# Altium PCB TD_A.pcbdoc
Units mil, origin at the board's own origin, x right, y up, seen from the top; angles counter-clockwise.
Board outline 3250 x 2850 mil, 2 copper layers (Top Layer, Bottom Layer); 39 components, 27 nets, 123 pads, 86 vias.
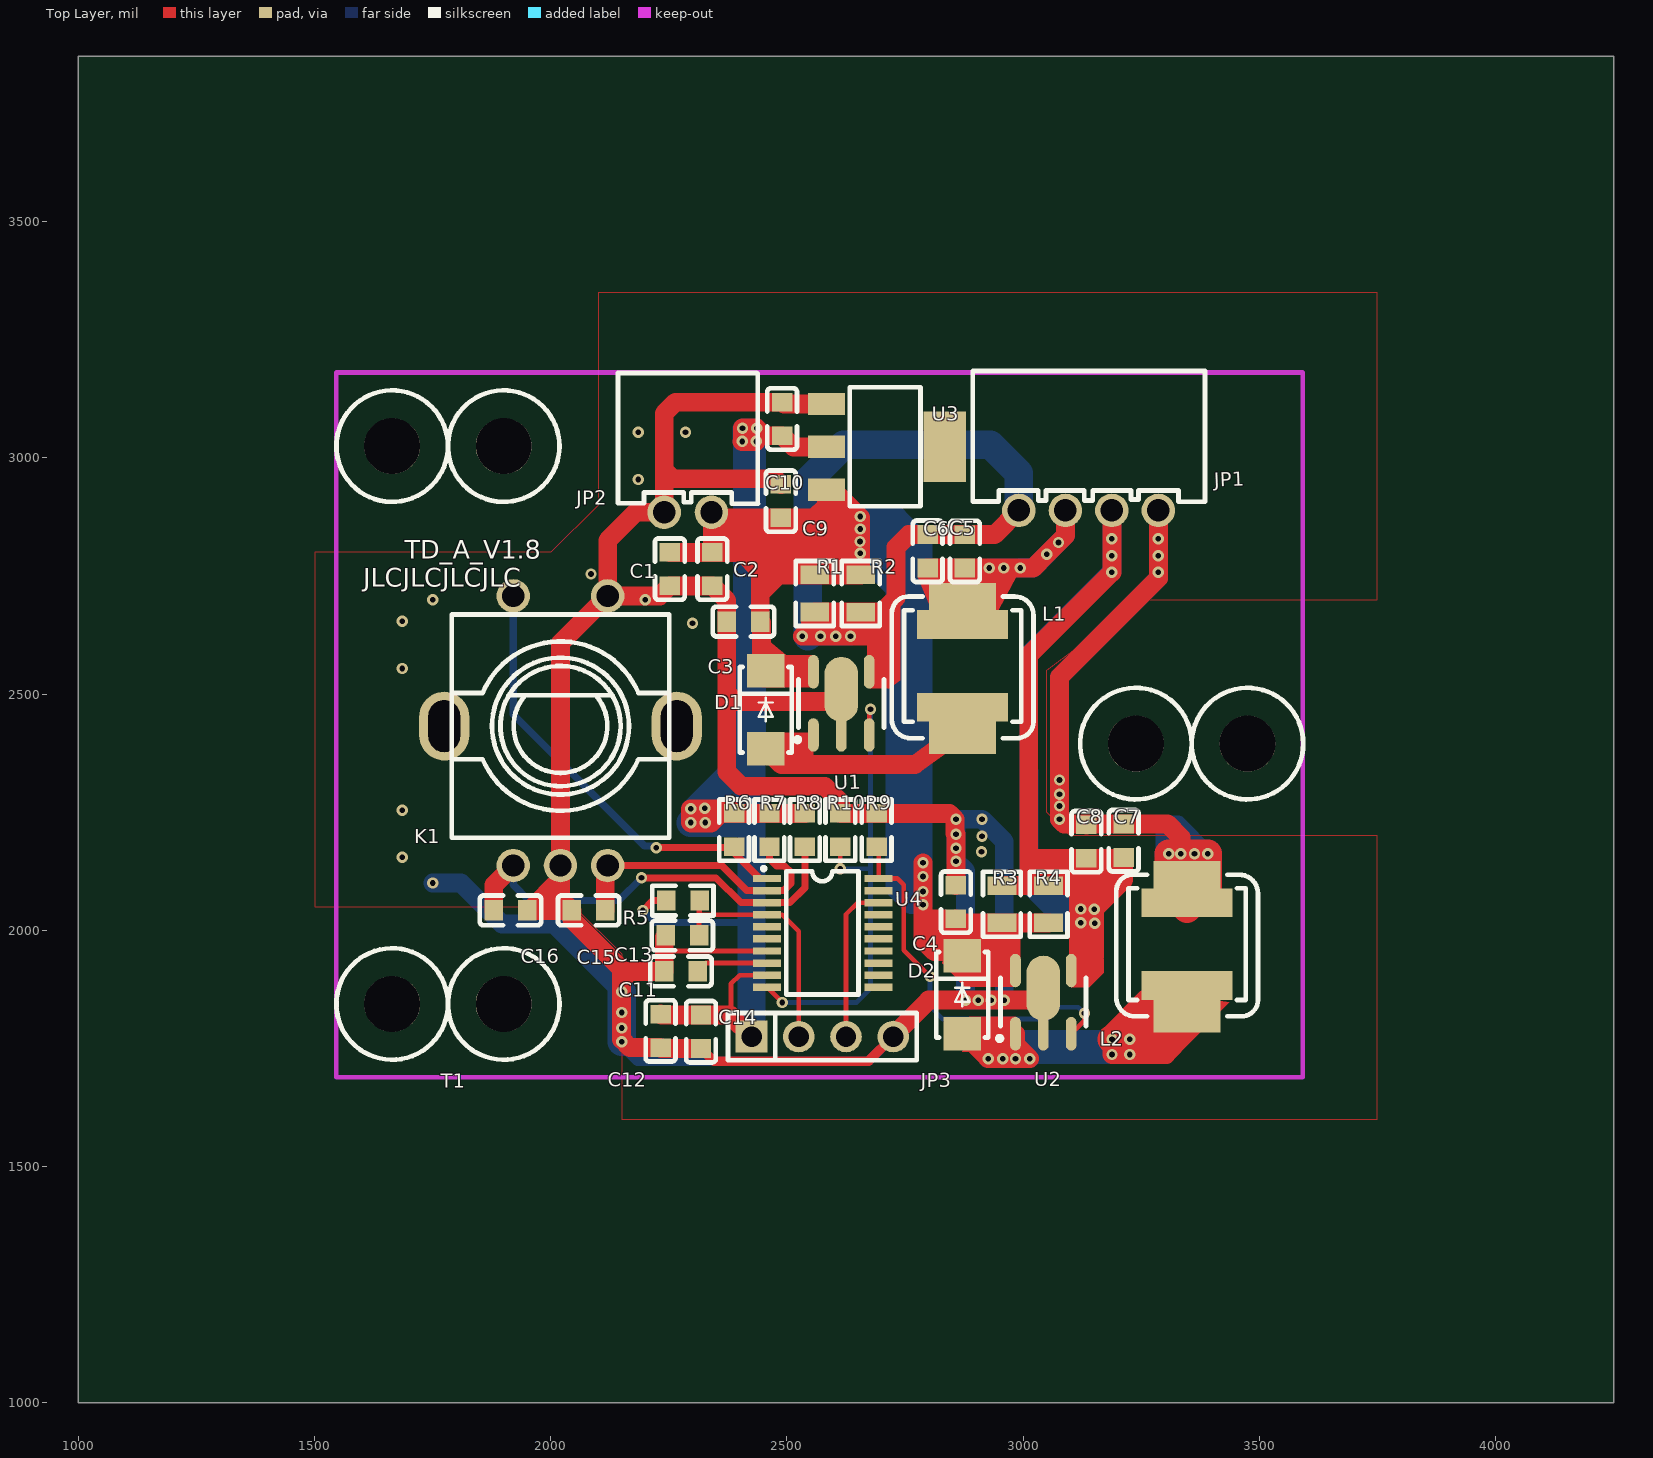
[diagram p0: Top Layer view]
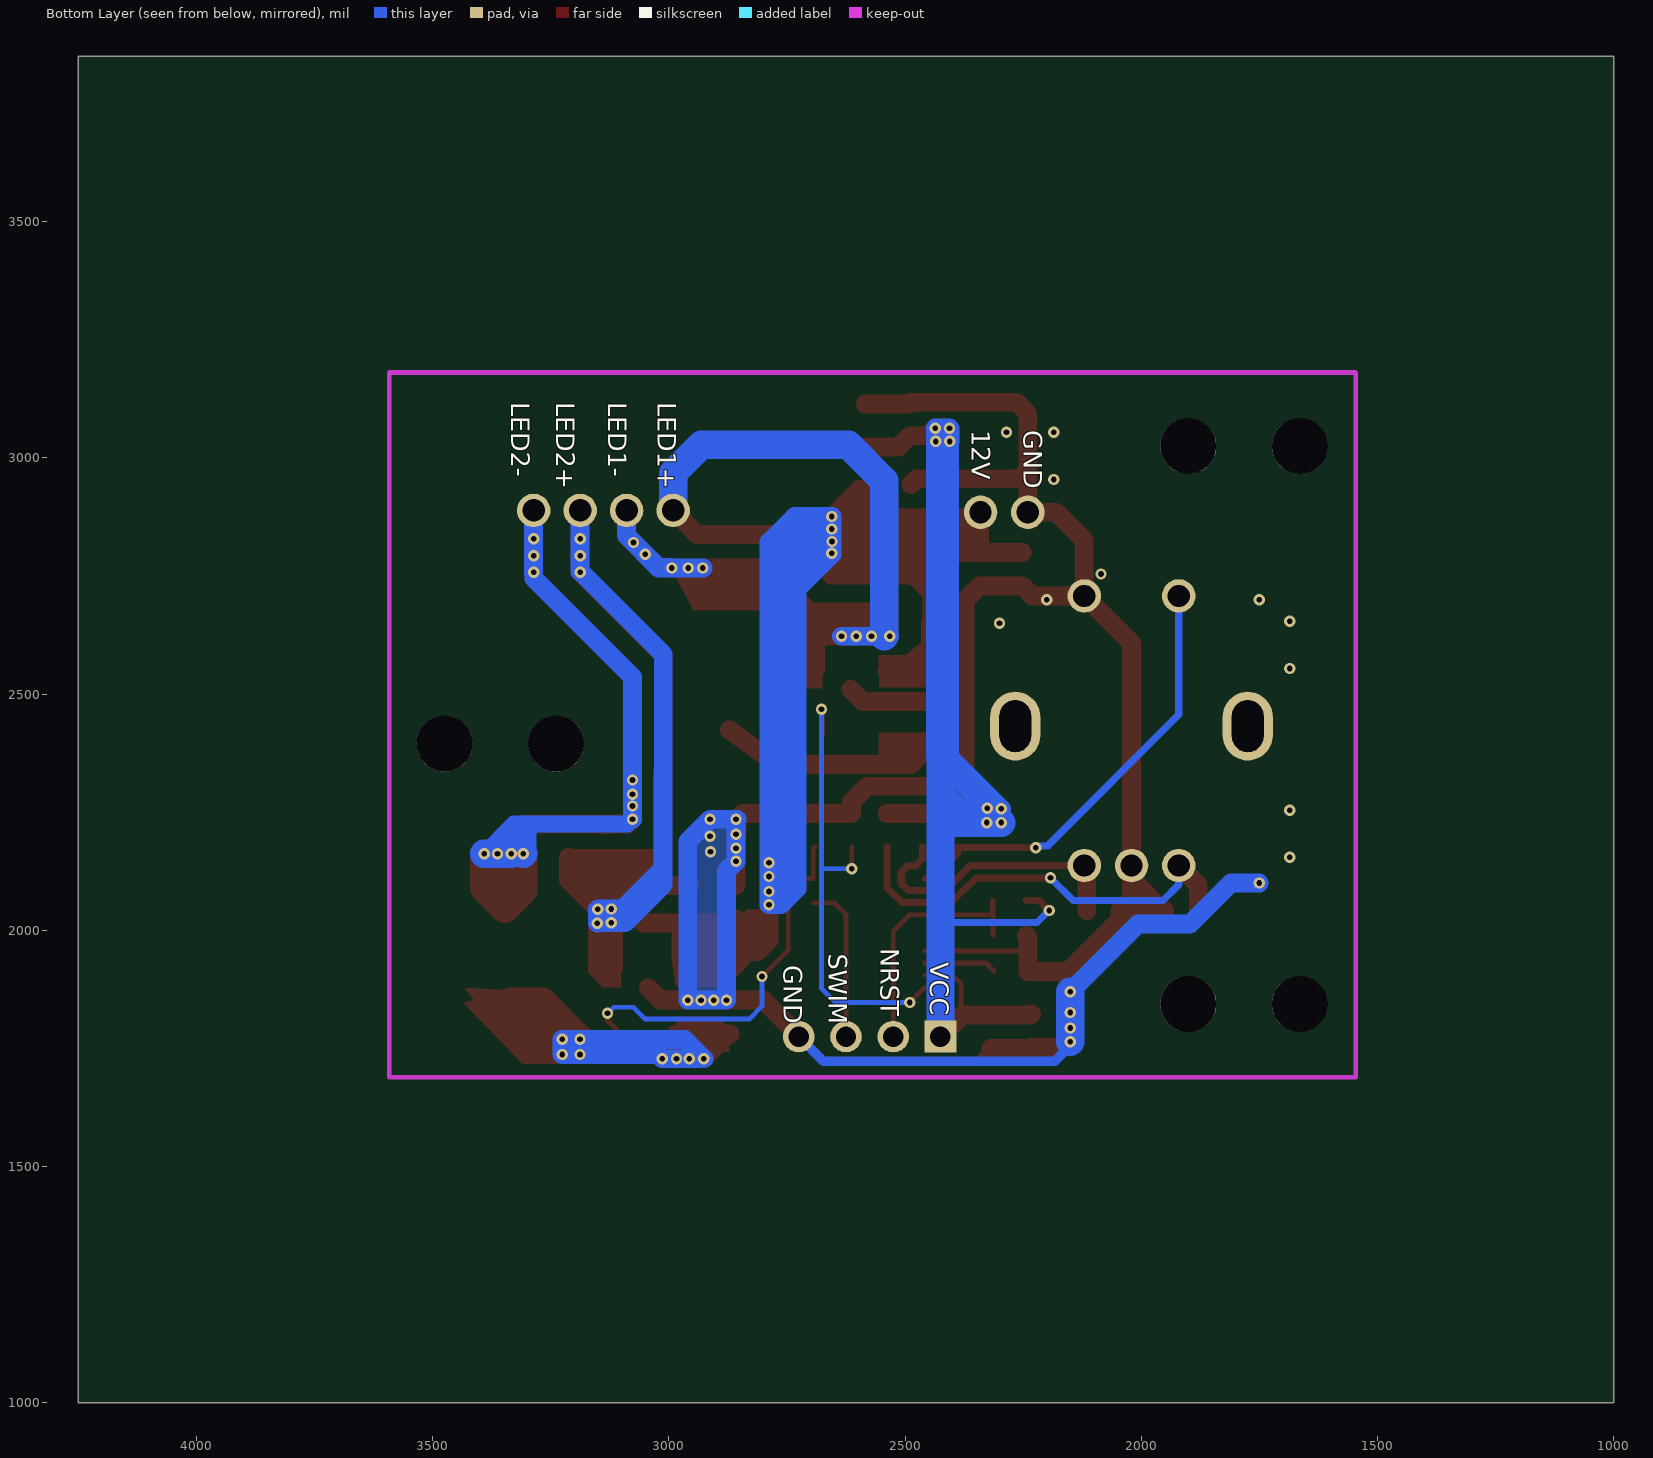
[diagram p1: Bottom Layer view, seen from below]

## Layer stack, top to bottom
Top Layer: signal copper (thickness not stored)
Dielectric: dielectric 12.6, FR-4, Dk 4.8
Bottom Layer: signal copper (thickness not stored)

## Board outline
4250,1000 1000,1000 1000,3850 4250,3850

## Components (designator, comment, footprint, x,y, rotation, side; value= is the part's Value field where it differs from the comment)
C1 "100nf" C0603 2252,2764.57 r90 top
C2 "100nf" C0603 2341.99,2764.57 r270 top
C3 "100nF" C0603 2408,2653.56 r0 top
C4 "100nF" C0603 2857.77,2059.57 r270 top
C5 "100nf" C0603 2876.77,2802.37 r270 top
C6 "100nf" C0603 2798.03,2802.4 r270 top
C7 "100nf" C0603 3213,2189.56 r90 top
C8 "100nf" C0603 3133.99,2187.56 r90 top
C9 "100nf" C0603 2487,2908.57 r270 top
C10 "100nf" C0603 2489.9,3082.54 r270 top
C11 "1uf" C0603 2275.57,1913 r0 top
C12 "1uf" C0603 2232.39,1787.06 r90 top
C13 "100nf" C0603 2278.57,1989 r180 top
C14 "100nf" C0603 2317.99,1785.17 r270 top
C15 "1nf" C0603 2080,2042 r0 top
C16 "1nf" C0603 1914.7,2042 r180 top
D1 "SS210-A" SMA_L4.4-W2.8-LS5.4-RD 2455,2467 r270 top
D2 "SS210-A" SMA_L4.4-W2.8-LS5.4-RD 2871,1863.32 r270 top
JP1 "led" XH2.54-4AW 3138.59,2888.98 r0 top
JP2 "power" XH2.54-2AW 2290.16,2885.04 r0 top
JP3 "swim" DIP-1X4P2.54 2575,1775 r0 top
K1 "EC11" EC11E1834403 2020.5,2422.45 r0 top
L1 "22uH" 22UH_NEW 2882,2567 r0 top
L2 "22uH" 22UH_NEW 3357.2,1978 r0 top
R1 "200" R0805 2559,2713.13 r270 top
R2 "200" R0805 2656.27,2713.1 r270 top
R3 "200" R0805 2955,2055 r90 top
R4 "200" R0805 3053.97,2055 r90 top
R5 "10k" R0603 2279.57,2063 r0 top
R6 "10k" R0603 2388,2212 r90 top
R7 "10k" R0603 2463,2212 r90 top
R8 "10k" R0603 2538,2212 r90 top
R9 "5.1k" R0603 2690,2212 r90 top
R10 "5.1k" R0603 2613,2212 r90 top
T1 "TK_M3" TD_TK_N 1664.03,1843.96 r180 top
U1 "VAS1260IB05E" SOT-89-5 2614.99,2480.47 r0 top
U2 "VAS1260IB05E" SOT-89-5 3042.77,1847.87 r0 top
U3 "AMS1117-3.3" SOT-223 2709,3023.5 r0 top
U4 "STM8S003F3P6" TSSOP-20 2575.92,1994.49 r0 top

## Footprints (in the part's own frame and the unit in brackets; to place one, negate y for a bottom-side part, rotate by r counter-clockwise, add the part's x,y. Pads: shape width x height; smd on the part's side, far side on the other; paste and mask are expansions set on the pad)
22UH_NEW [mm]
  rect 3.6x2.6 smd: 1(-0.254,-3.627) 2(-0.254,2.977)
  rect 4.9x1.55 smd: 1(-0.254,-2.413) 2(-0.254,2.037)
  silkscreen extent -4.06,-4.07 3.56,3.55
C0603 [mm]
  rect 1x1.1 smd: 1(-0.9,0) 2(0.9,0)
  silkscreen extent -1.65,-0.8 1.65,0.8
DIP-1X4P2.54 [mm]
  rect 1.7x1.7 hole 1.1: 1(-3.81,0)
  round 1.7 hole 1.1: 2(-1.27,0) 3(1.27,0) 4(3.81,0)
  silkscreen extent -5.08,-1.27 5.08,1.27
EC11E1834403 [mm]
  round 1.8 hole 1.2: A(-2.54,-7.25) B(2.54,-7.25) C(0,-7.25) D(-2.54,7.25) E(2.54,7.25)
  oval 2.7x3.7 hole 1.7 slot 2.8 at 90 deg: F(6.25,0.25) G(-6.25,0.25)
  silkscreen extent -5.85,-5.75 5.85,6.25
R0603 [mm]
  rect 1x1.1 smd: 1(-0.9,0) 2(0.9,0)
  silkscreen extent -1.65,-0.8 1.65,0.8
R0805 [mm]
  rect 1x1.55 smd: 1(-1,0) 2(1,0)
  silkscreen extent -1.75,-1.02 1.75,1.02
SMA_L4.4-W2.8-LS5.4-RD [mm]
  rect 1.8x2 smd: 1(-2.1,0) 2(2.1,0)
  silkscreen extent -2.3,-1.4 2.3,1.4
SOT-89-5 [mm]
  oval 0.58x1.8 smd: 1(-1.5,-1.7) 3(1.5,-1.7) 4(1.5,1.7) 5(-1.5,1.7)
  oval 0.58x2.4 smd: 2(0,-1.4)
  oval 1.8x3.5 smd: 2(0,0.75)
  silkscreen extent -2.48,-2.08 2.3,1.3
SOT-223 [mm]
  rect 2x1.2 smd: 1(-3.175,2.3) 2(-3.175,0) 3(-3.175,-2.3)
  rect 2.3x3.8 smd: 4(3.175,0)
  silkscreen extent -1.93,-3.2 1.87,3.2
TD_TK_N [mm]
  round 3 hole 3: 1(-46,-14) 1(-40,-14) 1(-6,0) 1(-6,-30) 1(0,0) 1(0,-30)
  silkscreen extent -49,-33 3,3
TSSOP-20 [mm]
  rect 1.494x0.4 smd: 1(-3.001,2.925) 2(-3.001,2.275) 3(-3.001,1.625) 4(-3.001,0.975) 5(-3.001,0.325) 6(-3.001,-0.324) 7(-3.001,-0.975) 8(-3.001,-1.625) 9(-3.001,-2.275) 10(-3.001,-2.925) 11(3.001,-2.925) 12(3.001,-2.275) 13(3.001,-1.625) 14(3.001,-0.975) 15(3.001,-0.325) 16(3.001,0.325) 17(3.001,0.975) 18(2.996,1.625) 19(2.996,2.275) 20(3.001,2.925)
  silkscreen extent -3.25,-3.31 1.91,3.53
XH2.54-2AW [mm]
  round 1.8 hole 1.2: 1(-1.27,0) 2(1.27,0)
  silkscreen extent -3.75,0.46 3.78,7.49
XH2.54-4AW [mm]
  round 1.8 hole 1.199: 1(-3.75,0) 2(-1.248,0) 3(1.251,0) 4(3.75,0)
  silkscreen extent -6.23,0.46 6.26,7.49

## Via types
v1: diameter 24, hole 12, Top Layer to Bottom Layer, 86 vias

## Nets (pads, with @x,y where several pads share a name; then routed paths per layer and width w, separated by ;. In a path a pad name is that pad's centre, name@x,y a point inside that pad or via, vN(x,y) a via of type N, cw(c..) or ccw(c..) an arc to the next point about the centre after c; other vN are vias at no path point)
EC11_A: C16.2 K1.A R8.1 U4.3 | length 925.2
  Top Layer w15: v1(2192,2111) 2350,2111 2402.5,2058.5 U4.3 2506.5,2058.5 2538,2090 R8.1
  Top Layer w40: C16.2 1879.3,2095.8 K1.A
  Bottom Layer w15: K1.A 1920.5,2096.5 1954,2063 2144,2063 v1(2192,2111)
EC11_B: C15.2 K1.B R7.1 U4.2 | length 618.9
  Top Layer w15: K1.B 2362,2137 2414.94,2084.06 U4.2 ; U4.2 2493.1,2084.1 2508,2099 2508,2123 2495,2136 2478,2136 2463,2151 R7.1
  Top Layer w40: C15.2 2115.4,2132 K1.B
EC11_KEY: K1.D R6.1 U4.1 | length 941
  Top Layer w15: v1(2223,2175) 2386.4,2175 R6.1 2388,2164 2442.3,2109.7 U4.1@2457.8,2109.7
  Bottom Layer w15: K1.D 1920.48,2456.52 2199,2178 2220,2178 v1(2223,2175)
GND: C1.1 C2.2 C3.1 C4.1 C9.1 C10.1 C11.1 C12.1 C13.2 C14.2 C15.1 C16.1 JP2.1 JP3.4 K1.C K1.E R9.2 R10.2 U1.2 U2.2 U3.1 U4.7 | length 7673
  Top Layer w10: C13.2 2243.1,1959.9 2246.9,1956.1 2264.1,1956.1 U4.7
  Top Layer w20: C14.2 2344.8,1722.9 2672.9,1722.9 JP3.4
  Top Layer w40: K1.E 2230.7,2707.9 C1.1 C2.2 2372.6,2698.6 C3.1 2372.6,2502.4 2391,2484 2589,2484 U1.2@2615,2510 ; C12.1 2234.3,1749.7 C14.2 ; C12.1 2167.37,1751.63 2150,1769 v1(2150,1793) v1(2150,1826) v1(2150,1870) 2150,1895 ; JP2.1 2180.04,2885.04 2120.48,2825.48 K1.E 2020.48,2607.87 K1.C ; JP2.1 2240.2,3094.2 2264,3118 C10.1 ; 2240.2,3000.9 2240.2,2973.8 2258,2956 2475,2956 C9.1 ; C13.2 2240.13,1986 C11.1 2168,1913 2150,1895 ; 2372.6,2564.9 2372.6,2335.4 2403.1,2304.9 2580.1,2304.9 2613,2272 R10.2 R9.2 2843.6,2247.4 2856,2235 2856,2205 v1(2857.77,2203.23) v1(2857.77,2174) v1(2857.77,2146) ; C10.1 2493.82,3114.05 U3.1 ; JP3.4 2725,1777 2800,1852 v1(2878,1852) v1(2905,1852) v1(2932,1852) v1(2960,1852) 3017.4,1852 U2.2@3042.8,1877.4 ; C4.1 v1(2857.77,2146) ; K1.C 2020.5,2107.5 1955,2042 C16.1 C15.1 ; K1.C 2020.5,2066.1 C15.1 ; C15.1 2044.6,2023.4 2150,1918 2150,1895
  Bottom Layer w20: v1(2150,1764) v1@2150,1756 ; v1(2150,1870) v1(2150,1826) v1(2150,1793) v1@2150,1756 ; JP3.4 2672.5,1722.5 2183.5,1722.5 v1@2150,1756
  Bottom Layer w40: v1(1750,2100) 1810,2100 1897,2013 2007,2013 v1(2150,1870) ; v1@2856,2235 v1(2913,2235) 2960,2188 v1(2960,1852) v1(2932,1852) v1(2905,1852) v1(2878,1852) 2878,2125.77 v1(2857.77,2146) v1(2857.77,2174) v1(2857.77,2203.23) 2857.77,2233.23 v1@2856,2235
  Bottom Layer w60: v1(2150,1764) v1(2150,1793) v1(2150,1826) v1(2150,1870)
  other v1: 1685.25,2154.27 2912,2166 2913,2199 2857.77,2235 1685.25,2254.27 1685.25,2554.27 2300,2650 1685.25,2654.27 1750,2700 2200,2700 2085.25,2754.27 2185.25,2954.27 2185.25,3054.27 2285.25,3054.27
L2_1: D2.2 L2.1 U2.1 | length 1599.7
  Top Layer w35: D2.2 2925.64,1726 2944,1726
  Top Layer w40: D2.2 2961.36,1780.64 v1(3014,1728) ; v1(2926,1728) v1(3014,1728) ; v1@2974,1729 2983,1729 v1(2984,1728) ; U2.1 2983.7,1758.3 v1(3014,1728) ; L2.1@3347.2,1835.2 3303,1737 v1(3226,1737) ; v1(3226,1737) v1(3188,1737) v1(3188,1769) v1(3226,1769) v1(3226,1737)
  Top Layer w60: v1(3188,1769) 3268,1849 3333.2,1849 L2.1@3347.2,1835.2
  Bottom Layer w40: v1(2926,1728) v1(2957,1728) v1(2984,1728) v1(3014,1728) 3023,1737 v1(3188,1737) v1(3226,1737) v1(3226,1769) v1(3188,1769) 2967,1769 v1(2926,1728)
LED1+: C5.1 C6.1 JP1.1 R1.2 R2.2 U1.4 | length 2324
  Top Layer w10: R2.2@2656.3,2673.8 2674.1,2656 U1.4 2713.4,2547.4 2735,2569 2735,2728.3
  Top Layer w40: R1.2 2656.3,2673.8 2700.8,2673.8 2731,2704 2731,2811 2757.8,2837.8 C6.1 2876.7,2837.8 C5.1 2939.8,2837.8 JP1.1 ; v1(2532.4,2622.4) v1(2571,2622.4) v1(2603.2,2622.4) v1(2634.6,2622.4) 2672.4,2622.4 2700,2650 2550,2650 2550,2640 v1(2532.4,2622.4)
  Bottom Layer w40: v1(2532.4,2622.4) v1(2571,2622.4) v1(2603.2,2622.4) v1(2634.6,2622.4)
  Bottom Layer w60: v1@2544.1,2622.4 2544.1,2951.5 2620.4,3027.8 2931,3027.8 2990.94,2967.86 JP1.1
LED1-: C5.2 C6.2 JP1.2 L1.2 | length 741.6
  Top Layer w40: C6.2 2798.1,2766.9 C5.2 ; C5.2 2876.84,2767 v1(2928,2767) v1(2959,2767) v1(2994,2767) 3021,2767 v1(3050,2796) v1(3075,2821) 3089.4,2835.4 JP1.2
  Bottom Layer w40: JP1.2 3089.4,2835.4 3021,2767 v1(2994,2767) ; v1(2994,2767) v1(2959,2767) v1(2928,2767) 3022,2767 3023,2768 2995,2768 v1(2994,2767)
LED2+: C7.1 C8.1 JP1.3 R3.2 R4.2 U2.4 | length 3147.5
  Top Layer w10: 3101.8,2094.4 U2.4 3137.8,1914.8 3166,1943 3166,2094.4
  Top Layer w40: R3.2 R4.2 ; 3004.6,2094.4 3012,2101.7 3012,2582 v1(3187.84,2757.8) v1@3187.8,2791 ; 3012,2158 3017.87,2152.13 C8.1 C7.1@3213,2152.13 ; v1(3150.9,2044.5) 3213,2106.6 C7.1@3213,2152.13 ; v1@3187.84,2791 3187.84,2827 JP1.3 ; C7.1 C7.1@3213,2152.13
  Bottom Layer w40: 3012.1,2131.04 3098.64,2044.5 v1(3150.9,2044.5) ; JP1.3 3187.8,2759.9 3012,2584.1 3012.1,2096.8 ; 3012.1,2096.8 3063.9,2045 v1(3121.8,2045) ; 3012.1,2096.8 3092.9,2016 v1(3122.2,2016) ; v1(3121.8,2045) 3122.2,2044.6 v1(3122.2,2016) ; v1(3121.8,2045) 3150.4,2045 v1(3150.9,2044.5) ; v1(3122.2,2016) 3150.5,2016 v1(3151.5,2015) 3151.5,2043.9 v1(3150.9,2044.5)
  other v1: 3187.84,2793 3187.84,2829
LED2-: C7.2 C8.2 JP1.4 L2.2 | length 3026.4
  Top Layer w40: C8.2 C8.2@3136,2225 ; v1(3286.2,2793) v1(3286.2,2829) JP1.4 ; JP1.4 3286.24,2745.24 3077,2536 v1(3077,2318) v1(3077,2235) 3087,2225 C8.2@3136,2225 ; v1(3308,2162) 3308,2102 L2.2@3334,2076 ; v1(3391,2162) 3391,2133 L2.2@3334,2076 ; C8.2@3136,2225 C7.2 3306,2225 3334,2197 v1(3334,2162) L2.2@3334,2076
  Top Layer w60: L2.2@3308,2084.6 v1(3308,2162) v1(3391,2162) 3391,2089.6 3347,2045.6 L2.2@3308,2084.6
  Bottom Layer w35: v1(3077,2235) 3087,2225 3328,2225 v1(3391,2162)
  Bottom Layer w40: v1(3077,2235) 3077,2536 3286.2,2745.2 v1(3286.2,2757.8) v1(3286.2,2757.8) JP1.4
  Bottom Layer w60: v1(3308,2162) 3310,2164 3310,2204 3334,2180 v1(3334,2162) v1(3391,2162)
  other v1: 3363,2162 3077,2263 3077,2288
NRST: C13.1 JP3.2 R5.2 U4.4 | length 552
  Top Layer w10: C13.1 2314,2062 R5.2 2315,2032.9 U4.4 2490.1,2032.9 2525,1998 JP3.2
null: 
PWM1: R10.1 U1.3 U4.10 | length 1002.4
  Top Layer w10: U4.10 2490,1847.1 v1(2490,1847) ; v1(2613,2130) R10.1 ; U1.3 2674.1,2465.1 v1(2677,2468)
  Bottom Layer w10: v1(2490,1847) 2647,1847 2677,1877 v1(2677,2468) ; v1(2613,2130) 2677,2130
PWM2: R9.1 U2.3 U4.20 | length 816.1
  Top Layer w10: R9.1 2694.1,2172.5 2694.1,2109.7 2733.4,2109.7 2747,2096 2747,1958 v1(2803,1902) ; U2.3 3130,1809.1 v1(3130,1824)
  Bottom Layer w10: v1(2803,1902) 2803,1839 2830,1812 3050,1812 3075,1837 3117,1837 v1(3130,1824)
S$21: 
S$23: 
S$61: 
S$63: 
S$71: 
S$81: 
S$83: 
S$86: 
S$88: 
SWIM: JP3.3 U4.18 | length 338
  Top Layer w10: JP3.3 2625,2034 2649.5,2058.5 U4.18
U1_1: D1.2 L1.1 U1.1 | length 454.3
  Top Layer w40: D1.2@2455,2384 2488.32,2351 2771,2351 L1.1@2872,2424.2
U4_8: C11.2 U4.8 | length 154
  Top Layer w10: C11.2 2328.5,1930.5 U4.8
VCC: C10.2 C12.2 C14.1 JP3.1 R5.1 R6.2 R7.2 R8.2 U3.2 U4.9 | length 4062.1
  Top Layer w10: 2381.5,1800.4 2381.5,1886.5 2399.9,1904.9 U4.9
  Top Layer w15: v1(2195,2042) 2216,2063 R5.1
  Top Layer w40: C12.2 2234.3,1820.6 C14.1 2379.4,1820.6 JP3.1 ; R6.2 2359.43,2247.43 2339,2227 2297,2227 v1(2296,2228) v1(2296,2257) 2378.4,2257 R6.2 R7.2 R8.2 ; U3.2 2513.5,3023.5 C10.2 2451.9,3047.1 v1(2436,3063) ; v1(2436,3063) v1(2406,3063) 2406,3036 v1(2405,3035) v1(2435,3035) 2435,3062 v1(2436,3063)
  Bottom Layer w15: v1(2195,2042) 2220.83,2016.17 2425,2016.17
  Bottom Layer w40: v1(2326,2258) 2436,2368 v1(2436,3063) ; 2425,2300.34 2381.66,2257 v1(2296,2257) 2406,2367 v1(2406,3063) ; v1(2406,3063) 2405,3062 v1(2405,3035) v1(2435,3035) 2436,3036 v1(2436,3063) ; v1(2406,3063) v1(2436,3063)
  Bottom Layer w60: v1(2296,2228) 2425,2228 ; JP3.1 2425,2404.29
  other v1: 2327,2228
VIN: C1.2 C2.1 C3.2 C4.2 C9.2 D1.1 D2.1 JP2.2 R1.1 R2.1 R3.1 R4.1 U1.5 U2.5 U3.3 | length 4052.4
  Top Layer w10: 2443.4,2713.4 2446,2710.9 2446,2580 2446,2558.68 D1.1 2457.28,2547.4 U1.5
  Top Layer w40: C1.2 C2.1 ; D1.1@2446,2580 2446,2651 C3.2 ; C9.2 2352.1,2873.1 JP2.2 2342,2883.2 C2.1 ; C9.2 2558.13,2873.13 2584.01,2899.01 U3.3 ; U3.3@2584,2932.9 2597,2932.9 2656.3,2873.7 R2.1 R1.1 2482.5,2752.5 2443.4,2713.4 C3.2 ; v1(2788,2143) v1(2788,2114) v1(2788,2082) v1(2788,2054) 2788,1979 2812.1,1954.9 D2.1@2857.8,1954.9 ; 2929,1954.87 2967,1954.87 2967,1995.48 2987.14,2015.63 ; 2929,1954.9 D2.1@2857.8,1954.9 ; R4.1 R3.1 2866.3,2015.6 C4.2 D2.1@2857.8,1954.9 ; C2.1 2404,2800 2443.4,2760.6 C3.2
  Bottom Layer w40: v1@2654.5,2796.5 v1(2654.5,2823) 2654.5,2849 v1(2655,2849.5) v1(2655,2876) 2734,2876 2788,2822 v1(2788,2143) v1(2788,2114) v1(2788,2082) v1(2788,2054) 2763,2054 2729,2088 2729,2722 2655,2796 v1@2654.5,2796.5
  other v1: 2655,2798
pads on no net: K1.F K1.G T1.1 U3.4 U4.5 U4.6 U4.11 U4.12 U4.13 U4.14 U4.15 U4.16 U4.17 U4.19

## Polygon pours and split planes (outlines as drawn)
GND on Bottom Layer (solid): 2100,3250 2100,2900 2000,2800 1500,2800 1500,2050 2050,2050 2150,1950 2150,1500 3750,1500 3750,2200 3100,2200 3050,2250 3050,2550 3200,2700 3750,2700 3750,3250
GND on Top Layer (solid): 2100,3350 2100,2900 2000,2800 1500,2800 1500,2050 2050,2050 2150,1950 2150,1600 3750,1600 3750,2200 3100,2200 3050,2250 3050,2550 3250,2700 3750,2700 3750,3350

## Other copper
Top Layer:
  region net VIN: 2555,2514 2469,2514 2448,2514 2417,2556 2456,2617 2498,2582 2556,2582
  region net U1_1: 2555,2419 2449,2418 2450,2376 2492,2351 2557,2348
  region net LED1+: 2675,2512 2715,2511 2740,2529 2738,2715 2676,2674
  region net LED2+: 3102,1879 3140,1879 3171,1910 3168,2093 3102,2093
  region net VIN: 2994,1940 2994,2009 2844,2007 2829,1930 2876,1880 2984,1880
  region net L2_1: 2886,1817 2984,1817 2979,1741 2871,1743
  region net VIN: 2837,2043 2797,2043 2792,1972 2860,1953
  region net LED1-: 2777,2748 2807,2678 2947,2678 2986,2751
  region net VIN: 2339,2885 2340,2799 2397,2801 2462,2733 2658,2752 2660,2879 2594,2935 2549,2867
  region net LED2+: 3214,2157 3174,2074 3065,2075 3009,2099 3018,2156
  region net LED2-: 3314,2163 3398,2166 3386,2120 3335,2108
  region net L2_1: 3276,1870 3432,1878 3347,1767
  region net L2_1: 3315,1723 3436,1848 3279,1872 3203,1750
Bottom Layer:
  region net VIN: 2791,2053 2726,2098 2727,2722 2657,2799 2658,2882 2727,2882 2793,2818

## Silkscreen, mask and mechanical layers (free items; w line width, h text height)
Top Overlay:
  text "TD_A_V1.8" at 1690.73,2786.84 h39.37
  text "JLCJLCJLCJLC" at 1603.03,2726.82 h39.37
Bottom Overlay:
  text "LED1+" at 3023.32,3117.52 h39.37 r90
  text "LED1-" at 3128.34,3117.52 h39.37 r90
  text "LED2+" at 3238.34,3117.52 h39.37 r90
  text "LED2-" at 3333.32,3117.52 h39.37 r90
  text "GND" at 2248.64,3058.27 h39.37 r90
  text "12V" at 2358.88,3058.27 h39.37 r90
  text "NRST" at 2551.41,1961.5 h39.37 r90
  text "SWIM" at 2661.41,1950.76 h39.37 r90
  text "VCC" at 2446.39,1931.79 h39.37 r90
  text "GND" at 2756.39,1926.42 h39.37 r90